# Altium PCB PCB1.PcbDoc
Units mm, origin at the board's own origin, x right, y up, seen from the top; angles counter-clockwise.
Board outline 72 x 40 mm, 2 copper layers (Top Layer, Bottom Layer); 35 components, 27 nets, 150 pads, 55 vias.
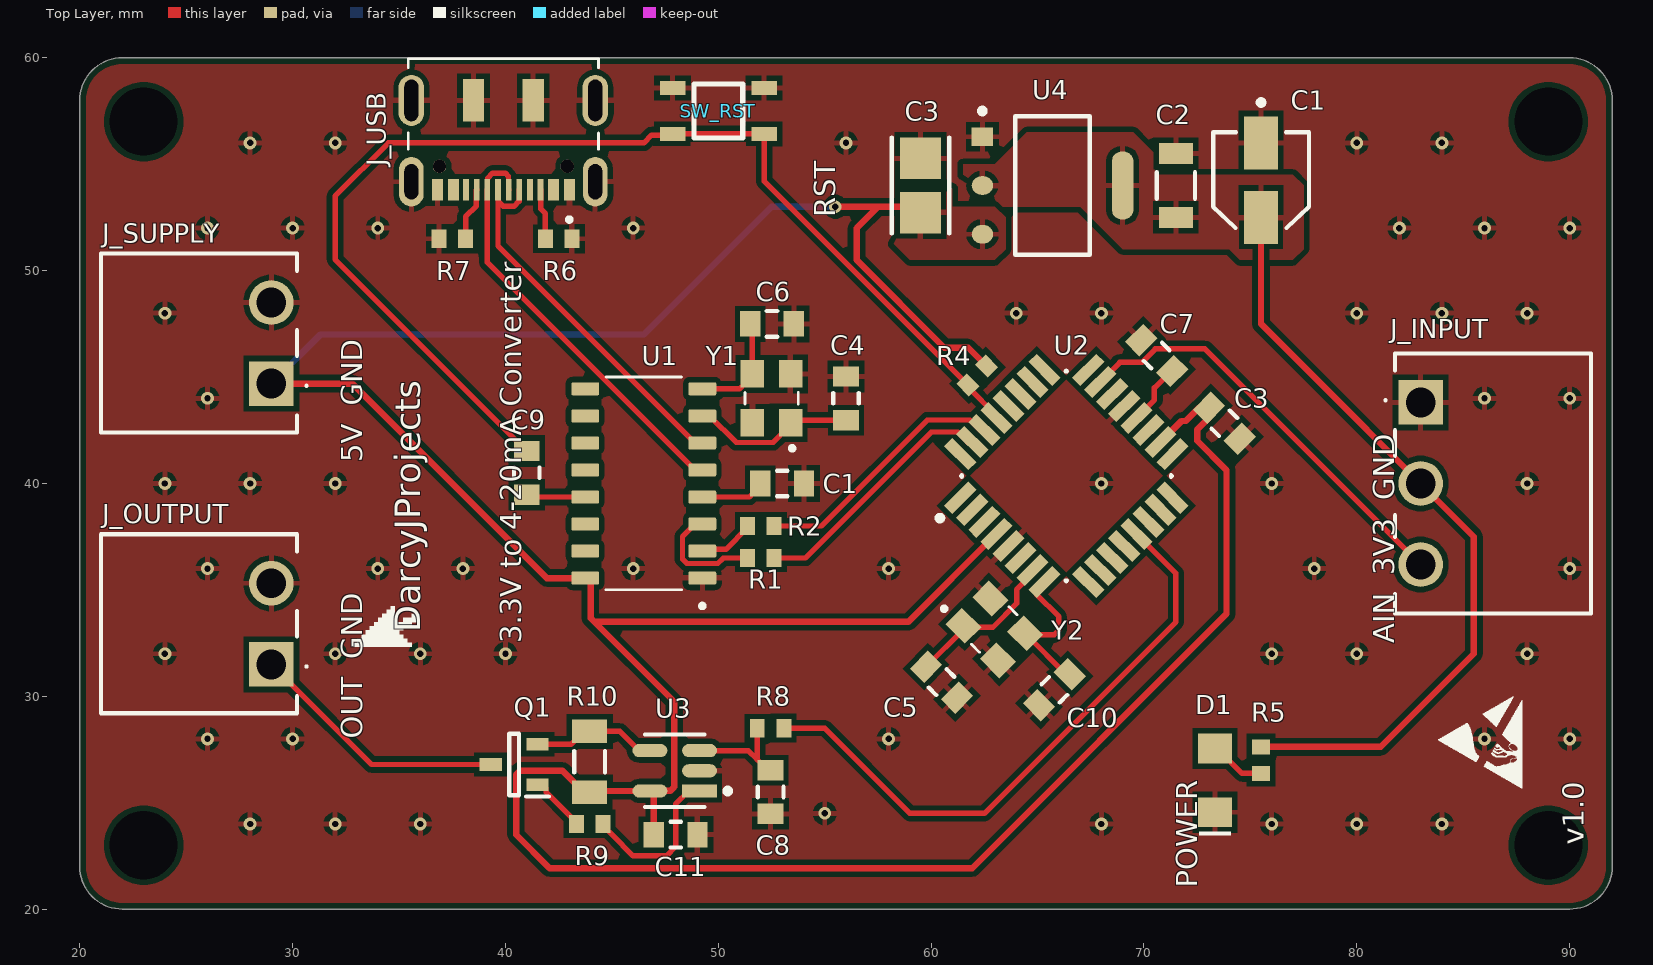
[diagram p0: Top Layer view]
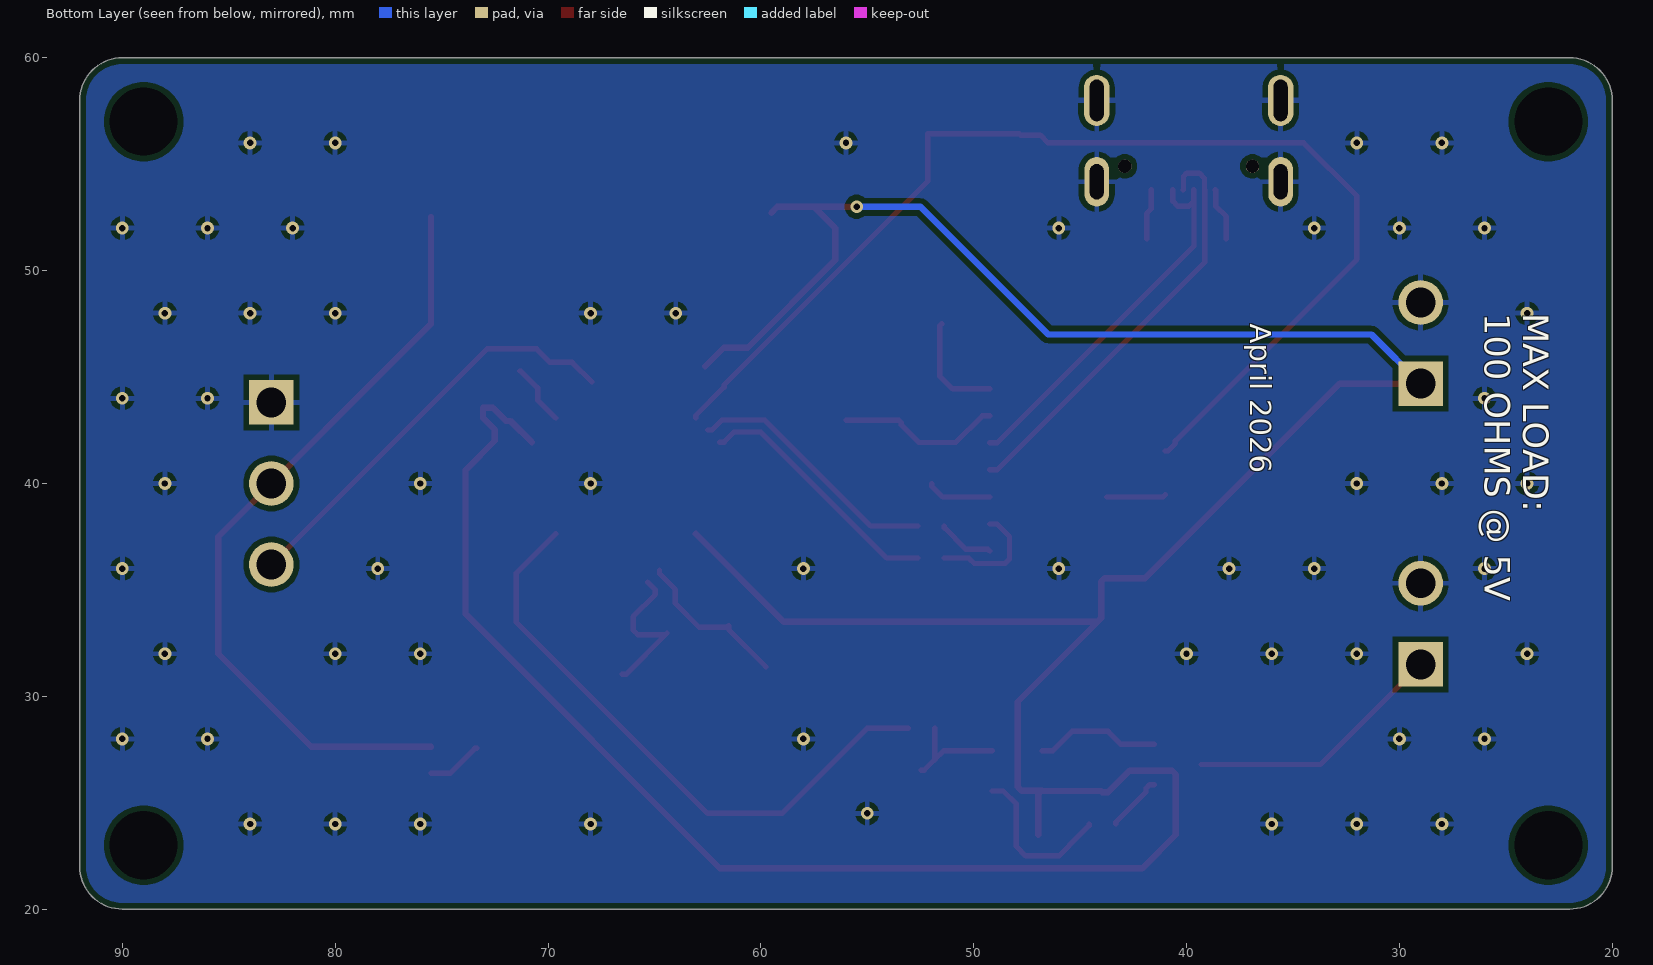
[diagram p1: Bottom Layer view, seen from below]
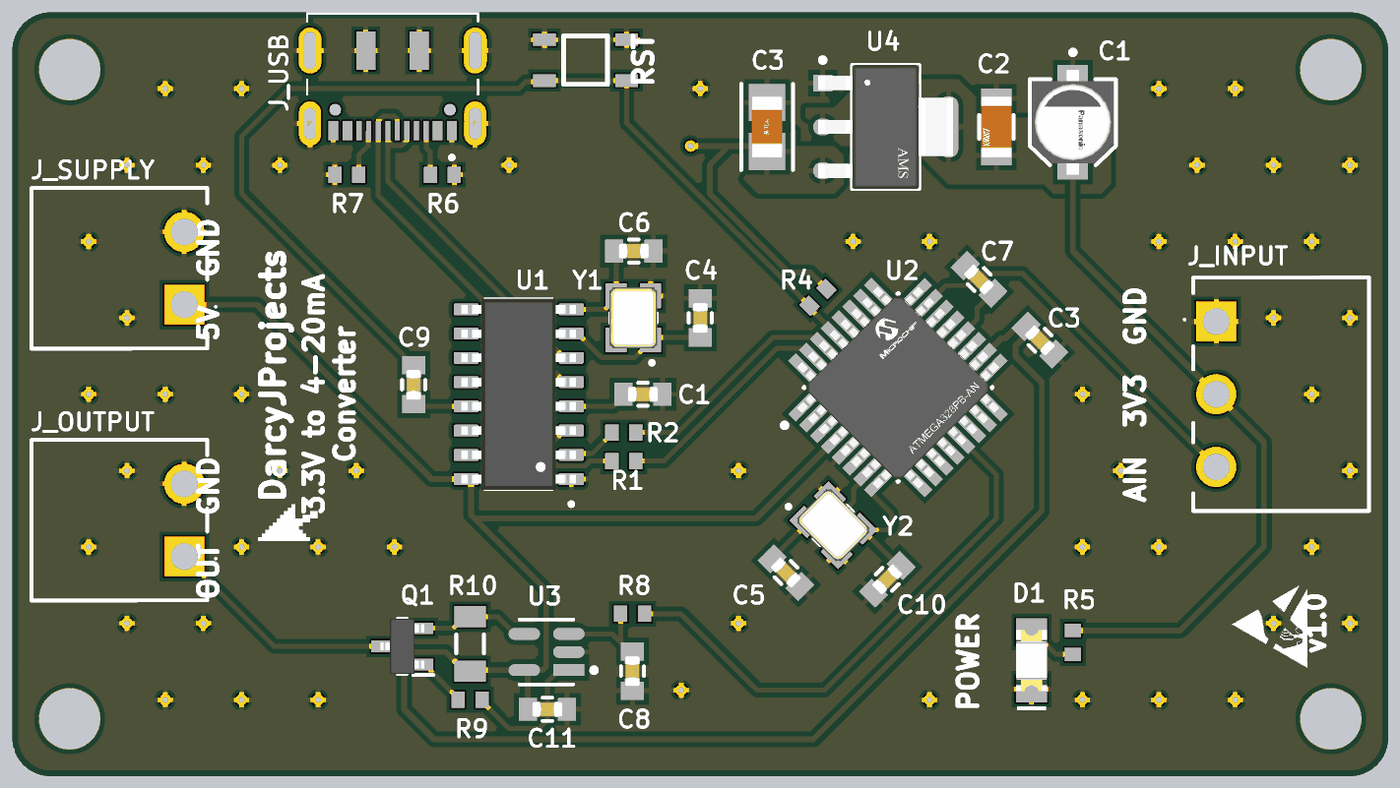
[diagram p2: 3D render of the assembled board from above, using the file's embedded part models]

## Layer stack, top to bottom
Top Solder: solder mask 0.0102, Solder Resist, Dk 3.5
Top Layer: signal copper 0.0356
Dielectric 1: dielectric 0.32, FR-4, Dk 4.8
Bottom Layer: signal copper 0.0356
Bottom Solder: solder mask 0.0102, Solder Resist, Dk 3.5

## Board outline
20,22 20,58 cw(c22,58) 22,60 90,60 cw(c90,58) 92,58 92,22 cw(c90,22) 90,20 22,20 cw(c22,22)

## Design rules (kind name [scope] priority, off if disabled: settings)
BoardOutlineClearance [All] p1: gap=0.3 ignorepadtopadclearanceinfootprint=FALSE
Clearance [All] p1: gap=0.254 ignorepadtopadclearanceinfootprint=FALSE except(0.15: Arc-Arc Arc-Track Arc-SMDPad Track-Track Track-SMDPad SMDPad-SMDPad)
PolygonConnect [All] p1: connectstyle=Relief reliefconductorwidth=0.254 reliefentries=4 polygonreliefangle="90 Angle" airgapwidth=0.254
RoutingVias [All] p1: holewidth=0.3 width=0.6 viastyle="Through Hole" minholewidth=0.3 minwidth=0.6 maxholewidth=0.4 maxwidth=0.7
SolderMaskExpansion [All] p1: expansion=0.102 istentingtop=FALSE
SupplyNets "Schematic Supply Nets_2" [InNet('3V3')] p1: voltage=0.000
SupplyNets "Schematic Supply Nets_1" [InNet('GND')] p2: voltage=0.000
SupplyNets "Schematic Supply Nets" [InNet('+5')] p3: voltage=0.000
Width Width_Power [InNetClass('POWER')] p1: maxlimit=0.3 minlimit=0.3 preferedwidth=0.3 minimp=50.000000 maximp=50.000000 favimp=50.000000
Width [All] p2: maxlimit=0.254 minlimit=0.254 preferedwidth=0.254
30 further rules are at their usual default settings.

## Classes and differential pairs
net class POWER: 3V3 +5 GND
component class Main: C1 C2 C3 C4 C5 C6 C7 C8 C9 C10 C11 D1 J_INPUT J_OUTPUT J_SUPPLY J_USB Q1 R1 R2 R4 R5 R6 R7 R8 R9 R10 SW_RST U1 U2 U3 U4 Y1 Y2

## Components (designator, comment, footprint, x,y, rotation, side; value= is the part's Value field where it differs from the comment)
C1 "100nF" FP-CGA3E-0_3-0_1-IPC_A 53,40 r180 top
C1 "10uF" FP-FKB-MFG 75.5,54.25 r270 top
C2 "100nF" FP-1206-L_3_2_0_2-W_1_6_0-MFG 71.5,54 r270 top
C3 "100nF" FP-CGA3E-0_3-0_1-IPC_A 73.778,42.828 r315 top
C3 "10uF" FP-C3216-160-0_2-IPC_A 59.5,54 r90 top
C4 "22pF" FP-CGA3E-0_3-0_1-IPC_A 56,44 r90 top
C5 "22pF" FP-CGA3E-0_3-0_1-IPC_A 60.487,30.664 r315 top
C6 "22pF" FP-CGA3E-0_3-0_1-IPC_A 52.525,47.5 r0 top
C7 "100nF" FP-CGA3E-0_3-0_1-IPC_A 70.596,46.01 r135 top
C8 "1uF" FP-CGA3E-0_3-0_1-IPC_A 52.455,25.5 r270 top
C9 "100nF" FP-CGA3E-0_3-0_1-IPC_A 41,40.5 r270 top
C10 "22pF" FP-CGA3E-0_3-0_1-IPC_A 65.79,30.31 r225 top
C11 "100nF" FP-CGA3E-0_3-0_1-IPC_A 48,23.5 r180 top
D1 "Red 1206" WL-SMCW_1206_150120xx75000 73.337,26.054 r90 top
J_INPUT "3Pin" 15EDGRC-3.81-03P 83,43.81 r270 top
J_OUTPUT "15EDGRC-3.81-02P" 15EDGRC-3.81-02P 29,31.5 r90 top
J_SUPPLY "15EDGRC-3.81-02P" 15EDGRC-3.81-02P 29,44.69 r90 top
J_USB "USBC" JAE_DX07S016JA1R1500 39.9,54.9 r180 top
Q1 "MMBT3906,215" SOT95P230X110-3N 40.407,26.796 r180 top
R1 "1K" RESC1608X55X30LL15T15 52,36.5 r180 top
R2 "1K" RESC1608X55X30LL15T15 52,38 r180 top
R4 "10K" RESC1608X55X30LL15T15 62.166,45.071 r45 top
R5 "5.1K" RESC1608X55X30LL15T15 75.5,27 r270 top
R6 "5.1K" RESC1608X55X30LL15T15 42.5,51.5 r180 top
R7 "5.1K" RESC1608X55X30LL15T15 37.5,51.5 r0 top
R8 "10K" RESC1608X55X30LL15T15 52.455,28.5 r0 top
R9 "1K" RESC1608X55X30LL15T15 43.955,24 r0 top
R10 "100R" RESC3216X70X50NL05T20 43.955,26.925 r90 top
SW_RST "3x4x2.5_TACTILE_BUTTON" 3x4x2.5_TACTILE_BUTTON 50,57.5 r180 top
U1 "CH340G" SOIC127P600X180-16N 46.5,40 r180 top
U2 "ATMEGA328PB-AN" FP-C04-074-MFG 66.354,40.354 r45 top
U3 "MCP6001T-I/OT" FP-C04-091-OT-IPC_A 47.955,26.5 r180 top
U4 "AMS1117-3.3" FP-AMS1117-IPC_C 65.705,54 r0 top
Y1 "3225 12MHz" XTAL_ECS-250-18-33B-JGN-TR 52.5,44 r90 top
Y2 "3225 16MHz" XTAL_ECS-250-18-33B-JGN-TR 62.962,33.139 r315 top

## Footprints (in the part's own frame and the unit in brackets; to place one, negate y for a bottom-side part, rotate by r counter-clockwise, add the part's x,y. Pads: shape width x height; smd on the part's side, far side on the other; paste and mask are expansions set on the pad)
3x4x2.5_TACTILE_BUTTON [mm]
  rect 1.2x0.65 smd: 1(-2.15,1.075) 2(2.15,1.075) 3(-2.15,-1.075) 4(2.15,-1.075)
  silkscreen extent -1.14,-1.27 1.14,1.27
15EDGRC-3.81-02P [mm]
  rect 2.1x2.1 hole 1.4: 1(0,0)
  round 2.1 hole 1.4: 2(3.81,0)
  silkscreen extent -2.3,-1.7 6.11,8
15EDGRC-3.81-03P [mm]
  rect 2.1x2.1 hole 1.4: 1(0,0)
  round 2.1 hole 1.4: 2(3.81,0) 3(7.62,0)
  silkscreen extent -2.3,-1.7 9.92,8
FP-1206-L_3_2_0_2-W_1_6_0-MFG [mm]
  rect 1x1.6 smd paste+0 mask+0: 1(-1.5,0) 2(1.5,0)
  silkscreen extent -0.63,-0.9 0.63,0.9, body extent -2.1,-1 2.1,1, height 0.25
FP-AMS1117-IPC_C [mm]
  rect 1.004x0.872 smd paste+0 mask+0: 1(-3.295,2.29)
  rrect100% 1.004x0.872 smd paste+0 mask+0: 2(-3.295,0) 3(-3.295,-2.29)
  rrect87% 1.004x3.182 smd paste+0 mask+0: 4(3.295,0)
  silkscreen extent -3.42,-3.25 1.75,3.62, body extent -3.9,-3.35 3.9,3.35, height 0.25
FP-C04-074-MFG [mm]
  rect 1.6x0.55 smd paste+0 mask+0: 1(-4.25,2.8) 2(-4.25,2) 3(-4.25,1.2) 4(-4.25,0.4) 5(-4.25,-0.4) 6(-4.25,-1.2) 7(-4.25,-2) 8(-4.25,-2.8) 17(4.25,-2.8) 18(4.25,-2) 19(4.25,-1.2) 20(4.25,-0.4) 21(4.25,0.4) 22(4.25,1.2) 23(4.25,2) 24(4.25,2.8)
  rect 0.55x1.6 smd paste+0 mask+0: 9(-2.8,-4.25) 10(-2,-4.25) 11(-1.2,-4.25) 12(-0.4,-4.25) 13(0.4,-4.25) 14(1.2,-4.25) 15(2,-4.25) 16(2.8,-4.25) 25(2.8,4.25) 26(2,4.25) 27(1.2,4.25) 28(0.4,4.25) 29(-0.4,4.25) 30(-1.2,4.25) 31(-2,4.25) 32(-2.8,4.25)
  silkscreen extent -5.72,-3.5 3.5,3.5, body extent -5.15,-5.15 5.15,5.15, height 0.25
FP-C04-091-OT-IPC_A [mil]
  rect 64.5x24.33 smd paste+0 mask+0: 1(-45.91,37.4)
  rrect100% 64.5x24.33 smd paste+0 mask+0: 2(-45.91,0) 3(-45.91,-37.4) 4(45.91,-37.4) 5(45.91,37.4)
  silkscreen extent -103,-67 55,67
FP-C3216-160-0_2-IPC_A [mm]
  rect 1.954x1.906 smd paste+0 mask+0: 1(-1.276,0) 2(1.276,0)
  silkscreen extent -2.25,-1.35 2.25,1.35, body extent -2.75,-1.45 2.75,1.45, height 0.25
FP-CGA3E-0_3-0_1-IPC_A [mm]
  rect 0.956x1.206 smd paste+0 mask+0: 1(-1.025,0) 2(1.025,0)
  silkscreen extent -0.25,-0.6 0.25,0.6, body extent -2,-1.1 2,1.1, height 0.25
FP-FKB-MFG [mm]
  rect 2.5x1.6 smd paste+0 mask+0: 1(-1.75,0) 2(1.75,0)
  silkscreen extent -3.77,-2.25 2.25,2.25, body extent -3.25,-2.5 3.25,2.5, height 0.25
JAE_DX07S016JA1R1500 [mm]
  rect 0.52x1 smd: 1(-3.1,1.1) 2(-2.35,1.1) 11(2.35,1.1) 12(3.1,1.1)
  rect 0.27x1 smd: 3(-1.75,1.1) 4(-1.25,1.1) 5(-0.75,1.1) 6(-0.25,1.1) 7(0.25,1.1) 8(0.75,1.1) 9(1.25,1.1) 10(1.75,1.1)
  rect 1x2 smd: S1(-1.4,-3.1) S2(1.4,-3.1)
  oval 1.158x2.316 hole 0.65 slot 1.65 at 90 deg: S3(-4.32,0.725) S4(4.32,0.725)
  oval 1.2x2.4 hole 0.65 slot 1.95 at 90 deg: S5(-4.32,-3.1) S6(4.32,-3.1)
  round 0.63 hole 0.63 unplated: ""(-3,0) ""(3,0)
  round 0.6 hole 0.6 unplated: ""(3,0)
  silkscreen extent -4.47,-5.05 4.47,2.6
RESC1608X55X30LL15T15 [mm] "Chip Resistor, 2-Leads, Body 1.60x0.80mm, IPC High Density"
  rect 0.7x0.85 smd: 1(-0.625,0) 2(0.625,0)
  body extent -0.87,-0.48 0.87,0.48, height 0.55
RESC3216X70X50NL05T20 [mm] "Chip Resistor, 2-Leads, Body 3.20x1.60mm, IPC Medium Density"
  rect 1.1x1.65 smd: 1(-1.425,0) 2(1.425,0)
  silkscreen extent -0.5,-0.72 0.5,0.72, body extent -1.63,-0.82 1.62,0.82, height 0.7
SOIC127P600X180-16N [mm]
  rrect25% 1.31x0.62 smd: 1(-2.75,4.445) 2(-2.75,3.175) 3(-2.75,1.905) 4(-2.75,0.635) 5(-2.75,-0.635) 6(-2.75,-1.905) 7(-2.75,-3.175) 8(-2.75,-4.445) 9(2.75,-4.445) 10(2.75,-3.175) 11(2.75,-1.905) 12(2.75,-0.635) 13(2.75,0.635) 14(2.75,1.905) 15(2.75,3.175) 16(2.75,4.445)
  silkscreen extent -2.85,-5 1.78,5.85, body extent -3,-5 3,5, height 1.8
SOT95P230X110-3N [mm]
  rect 1.05x0.6 smd: 1(-1.1,0.95) 2(-1.1,-0.95) 3(1.1,0)
  silkscreen extent -1.63,-1.45 0.23,1.5, body extent -1.15,-1.45 1.15,1.45, height 1.1
WL-SMCW_1206_150120xx75000 [mm] "SMD Mono-color Chip LED, body 3.2x1.6mm"
  rect 1.4x1.6 smd: 1(-1.5,0) 2(1.5,0)
  silkscreen extent -2.6,-0.75 -2.4,0.75, body extent -1.6,-0.8 1.6,0.8, height 0.68
XTAL_ECS-250-18-33B-JGN-TR [mm]
  rect 1.3x1.1 smd: 1(-1.15,-0.9) 2(1.15,-0.9) 3(1.15,0.9) 4(-1.15,0.9)
  silkscreen extent -2.45,-1.25 0.27,1.25, body extent -1.6,-1.25 1.6,1.25, height 0.8

## Part data
C1 C3 C7 C9 C11: library part CMP-2000-07546-2, "Cap Ceramic 100nF 50V X7R 10% Pad SMD 0603 +125°C Automotive T/R", Case Code (Imperial)=0603, Case Code (Metric)=1608, Dielectric=X7R, Max Operating Temperature=125°C, Min Operating Temperature=-55°C, Package Quantity=1, Ratings=AEC-Q200, Tolerance=10%, Voltage=50V, Capacitance=100nF, Case/Package=0603, Composition=Ceramic, Depth=0.8mm, Height=0.8mm, Lead Free="Lead Free", Length=1.6mm, Mount="Surface Mount", Packaging="Tape and Reel", Radiation Hardening=No, REACH SVHC="No SVHC", Termination=SMD/SMT, Thickness=0.035inch, Voltage Rating=50V, Voltage Rating (DC)=50V, Weight=7.1E-05oz, Width=0.8mm
C1: library part CMP-2000-06211-2, "CAP ALUM 10UF 20% 35V SMD", Case/Package=Radial, ESR (Equivalent Series Resistance)=1.35R, Leakage Current=3uA, Max Operating Temperature=105°C, Min Operating Temperature=-55°C, Package Quantity=1, Ripple Current=90mA, Tolerance=20%, Voltage=35V, Capacitance=10uF, Construction=Cylindrical, Contact Plating=Tin, Diameter=4mm, Height=5.8mm, Height - Seated (Max)=0.24inch, Impedance=1.35R, Lead Free="Lead Free", Length=5.8mm, Life (Hours)=2000Hour, Material=Aluminium, Mount="Surface Mount", Number of Pins=2, Packaging="Tape and Reel", Polarity=Polar, Radiation Hardening=No, REACH SVHC="No SVHC", Ripple Current (AC)=90mA, RoHS Compliant=Yes, Series=FK, Termination=SMD/SMT, Voltage Rating=35V, Voltage Rating (DC)=35V, Width=5.5mm
C2: library part CMP-2000-05018-2, "General Purpose Ceramic Capacitor, 1206, 100nF, 10%, X7R, 15%, 50V", Case Code (Imperial)=1206, Case Code (Metric)=3216, Dielectric=X7R, Dielectric Material=Ceramic, Insulation Resistance=100GR, Max Operating Temperature=125°C, Min Operating Temperature=-55°C, Package Quantity=1, Tolerance=10%, Voltage=50V, Capacitance=100nF, Case/Package=1206, Construction=Flat, Contact Plating=Tin, Depth=1.6mm, Dissipation Factor=2.5%, Height=0.94mm, Lead Free="Lead Free", Length=3.2mm, Mount="Surface Mount", Number of Pins=2, Packaging="Tape and Reel", Radiation Hardening=No, REACH SVHC="No SVHC", RoHS Compliant=Yes, Series=-, Termination=SMD/SMT, Thickness=0.037inch, Voltage Rating=50V, Voltage Rating (DC)=50V, Width=1.6mm
C3: library part CMP-2000-06045-2, "Multilayer Ceramic Capacitors 10uF ±10% 50V X5R SMD 1206", Case Code (Imperial)=1206, Case Code (Metric)=3216, Dielectric=X5R, Dielectric Material=Ceramic, Max Operating Temperature=85°C, Min Operating Temperature=-55°C, Package Quantity=1, Tolerance=10%, Voltage=50V, Capacitance=10uF, Case/Package=1206, Construction=Flat, Depth=1.6mm, Height=1.6mm, Lead Free="Lead Free", Length=3.2mm, Mount="Surface Mount", Packaging="Tape and Reel", Radiation Hardening=No, REACH SVHC="No SVHC", Resistor Type=Ceramic, RoHS Compliant=Yes, Series=C, Termination=SMD/SMT, Thickness=0.071inch, Voltage Rating=50V, Voltage Rating (DC)=50V, Weight=0.000571oz, Width=0.063inch
C4 C5 C6 C8 C10: library part CMP-2000-07546-2, "Cap Ceramic 100nF 50V X7R 10% Pad SMD 0603 +125°C Automotive T/R", Capacitance=100nF, Case Code (Imperial)=0603, Case Code (Metric)=1608, Dielectric=X7R, Max Operating Temperature=125°C, Min Operating Temperature=-55°C, Package Quantity=1, Ratings=AEC-Q200, Tolerance=10%, Voltage=50V, Case/Package=0603, Composition=Ceramic, Depth=0.8mm, Height=0.8mm, Lead Free="Lead Free", Length=1.6mm, Mount="Surface Mount", Packaging="Tape and Reel", Radiation Hardening=No, REACH SVHC="No SVHC", Termination=SMD/SMT, Thickness=0.035inch, Voltage Rating=50V, Voltage Rating (DC)=50V, Weight=7.1E-05oz, Width=0.8mm
D1: library part CMP-1426-00017-3, "Led, Red, 630 Nm, 1.9 V, 30 Ma, 60 Mcd Rohs Compliant: Yes", Case Code (Imperial)=1206, Case Code (Metric)=3216, Color=Red, Forward Current=100mA, Forward Voltage=1.9V, Max Operating Temperature=85°C, Max Reverse Voltage (DC)=5V, Min Operating Temperature=-40°C, Test Current=20mA, Case/Package=1206, Dominant Wavelength=630nm, Height=680µm, Length=3.2mm, Lens Style="Clear, Rectangular", Luminous Intensity=60mcd, Mount="Surface Mount", Packaging="Tape and Reel", Peak Wavelength=645nm, REACH SVHC=Unknown, RoHS=Compliant, Viewing Angle=140°, Wavelength=630nm, Width=1.6mm
J_INPUT: library part 15EDGRC-3.81-03P, Manufacturer_Name=Degson, Manufacturer_Part_Number=15EDGRC-3.81-02P-14-00A(H), Datasheet Link=https://www.tme.com/uz/ru/details/15edgrc3.81-02p/klemmnye-kolodki-razemnogo-tipa/degson-electronics/15edgrc-3-81-02p-14-00a-h/, Geometry.Height=7.2mm
J_OUTPUT J_SUPPLY: Manufacturer_Name=Degson, Manufacturer_Part_Number=15EDGRC-3.81-02P-14-00A(H), Datasheet Link=https://www.tme.com/uz/ru/details/15edgrc3.81-02p/klemmnye-kolodki-razemnogo-tipa/degson-electronics/15edgrc-3-81-02p-14-00a-h/, Geometry.Height=7.2mm
J_USB: library part DX07S016JA1R1500, "USB-C (USB TYPE-C) USB 2.0 Receptacle Connector 24 (16+8 Dummy) Position Surface Mount, Right Angle; Through Hole", Package=None, Availability=Unavailable, MP=DX07S016JA1R1500, Price=None
Q1: "Bipolar (BJT) Transistor PNP 40 V 200 mA 250MHz 250 mW Surface Mount TO-236AB", Package="SOT23-3 Nexperia USA Inc.", Check_prices=https://www.snapeda.com/parts/MMBT3906,215/Nexperia/view-part/?ref=eda, MF="Nexperia USA", MP=MMBT3906,215, SnapEDA_Link=https://www.snapeda.com/parts/MMBT3906,215/Nexperia/view-part/?ref=snap
R1 R2 R4 R5 R6 R7 R8 R9: library part CMP-2000-00803-1, Manufacturer=Panasonic, Part Number=ERJ-3GEYJ512V
R10: library part CMP-2003-00592-1, Manufacturer=Panasonic, Part Number=ERJ-8GEYJ241V
U1: "USB Interface Integrated Circuit", Package=None, Availability="Not in stock", Check_prices=https://www.snapeda.com/parts/Ch340G/WCH/view-part/?ref=eda, MF=WCH, MP=Ch340G, Price=None, SnapEDA_Link=https://www.snapeda.com/parts/Ch340G/WCH/view-part/?ref=snap
U2: library part CMP-06276-000029-1, "IC MCU 8BIT 32KB FLASH 32TQFP", Frequency=20MHz, Manufacturer=Microchip, Max Supply Voltage=5.5V, Min Supply Voltage=1.8V, Nominal Supply Current=0.06-5.2mA, Package=C04-074, Temperature="-40°C to +105°C", Temperature Range High=+105°C, Temperature Range Low=-40°C, Automotive=No, Category=IC, ComponentLink2Description=Datasheet, ComponentLink2URL=http://www.microchip.com/mymicrochip/filehandler.aspx?ddocname=en589665, Core Architecture=AVR, Data Bus Width=8bits, Device Class L1="Integrated Circuits (ICs)", Device Class L2="Embedded Processors and Controllers", Device Class L3=Microcontrollers, Digikey Description="IC MCU 8BIT 32KB FLASH 32TQFP", Footprint Url=https://ww1.microchip.com/downloads/en/DeviceDoc/32L_TQFP_7x7_PT_C04-0074B.pdf, Height=1.2mm, Interface=I2C,SPI,USART,2-Wire, Ipc Land Pattern Name=QFP80P900X900X120-32, Lead Free=Yes, Manufacturer Part Number=ATMEGA328PB-AN, Memory Size=32KBytes, Memory Type=FLASH, Mouser Description="AVR 32KBytes Flash, 1KBytes EEPROM, 2KBytes RAM, w - 20MHZ, TQFP, Extended TEMP, GREEN 5 V", Number Of A/D Converters=1, Number Of Adc Channels=8, Number Of Cores=1, Number Of I2C Channels=2, Number Of I/Os=27, Number Of Pwm Channels=10, Number Of Spi Channels=2, Number Of Timers/Counters=5, Number Of Uart Channels=2, Octopart=https://octopart.com/atmega328pb-an-microchip-77760226, Ram Size=2KBytes, RoHS=TRUE, Standoff Height=0.05mm
U3: library part CMP-0187-00462-3, "IC OPAMP GP 1 CIRCUIT SOT23-5", Case/Package=SOT-23, Input Bias Current=1pA, Input Offset Voltage (Vos)=4.5mV, Max Operating Temperature=85°C, Max Supply Voltage=6V, Min Operating Temperature=-40°C, Min Supply Voltage=1.8V, Nominal Supply Current=100uA, Operating Supply Voltage=5.5V, Output Current=23mA, Package Quantity=1, Power Supply Rejection Ratio (PSRR)=86dB, Voltage Gain=112dB, Bandwidth=1MHz, Common Mode Rejection Ratio=60dB, Contact Plating=Tin, Gain Bandwidth Product=1MHz, Height=1.3mm, Lead Free="Lead Free", Length=3.1mm, Mount="Surface Mount", Number of Amplifiers=1, Number Of Channels=1, Number of Circuits=1, Number of Elements=1, Number of Pins=5, Operating Supply Current=100uA, Output Current per Channel=23mA, Packaging="Tape and Reel", Radiation Hardening=No, REACH SVHC="No SVHC", Slew Rate=0.6V/µs, Unity Gain Bandwidth Product=1MHz, Voltage=6V, Width=1.8mm
U4: library part CMP-209535-000001-1, "LDO Voltage Regulators 1A, 3.3V", Dropout Voltage=1.1V, Manufacturer="Advanced Monolithic Systems", Max Junction Temp=+125°C, Max Power Dissipation=1.2W, Max Supply Voltage=15V, Nominal Supply Current=5mA, Output Current=1A, Output Voltage=3.3V, Package=AMS1117, Temperature="-40°C to +125°C", Temperature Range Low=-40°C, Automotive=No, Category=IC, ComponentLink2Description=Datasheet, ComponentLink2URL=http://www.advanced-monolithic.com/pdf/ds1117.pdf, Device Class L1="Integrated Circuits (ICs)", Device Class L2="Power Management ICs", Device Class L3="Voltage Regulators - Linear", Height=1.8mm, Ipc Land Pattern Name=SOT229P700X180-4, Lead Free=Yes, Manufacturer Part Number=AMS1117-3.3, Number of Outputs=1, Octopart=https://octopart.com/ams1117-3.3-advanced+monolithic+systems-25899300, Output Type=Fixed, RoHS=TRUE, Standoff Height=0.64mm, Temperature Range High=+125°C
Y1 Y2: library part ECS-250-18-33B-JGN-TR, Package=None, Availability=Unavailable, MP=ECS-250-18-33B-JGN-TR, Price=None

## Free pads (board coordinates)
  round 0 hole 3.2: 49(23,23) 49(23,57) 49(89,23) 49(89,57)

## Via types
v1: diameter 0.6, hole 0.3, Top Layer to Bottom Layer, 55 vias

## Nets (pads, with @x,y where several pads share a name; then routed paths per layer and width w, separated by ;. In a path a pad name is that pad's centre, name@x,y a point inside that pad or via, vN(x,y) a via of type N, cw(c..) or ccw(c..) an arc to the next point about the centre after c; other vN are vias at no path point)
3V3: C1.2@75.5,52.5 C2.2 J_INPUT.2 R5.1 U4.2 U4.4 | length 36.5
  Top Layer w0.3: R5.1 81.125,27.625 85.5,32 85.5,37.5 75.5,47.5 C1.2@75.5,52.5
+5: C3.1 C11.2 J_SUPPLY.1 R4.2 R10.1 U1.16 U2.4 U2.18 U3.5 U4.3 | length 161.3
  Top Layer w0.3: J_SUPPLY.1 32.81,44.69 41.945,35.555 U1.16 43.84,35.555 44,35.395 44,33.676 44.176,33.5 ; C11.2 46.975,25.403 46.828,25.55 U3.5 ; v1(55.5,53) 57.5,53 ; C3.1@59.5,52.724 59.224,53 57.5,53 ; R4.2 61.744,46.377 60.623,46.377 56.5,50.5 56.5,52 57.5,53 ; U2.4 58.934,33.5 44.176,33.5 ; U2.18 71.763,42.934 71.971,42.934 72.589,43.553 73.053,43.553 73.053,43.089 72.5,42.536 72.5,42 73.876,40.624 73.876,33.876 61.927,21.927 42.073,21.927 40.5,23.5 40.5,26.324 40.676,26.5 42.68,26.5 43.68,25.5 R10.1 44.005,25.55 U3.5 ; 44.176,33.5 47.933,29.743 47.933,25.742 47.757,25.566 46.805,25.566 U3.5
  Bottom Layer w0.3: J_SUPPLY.1 31.31,47 46.5,47 52.5,53 v1(55.5,53)
ARD_RX: R2.1 U2.30 | length 12.1
  Top Layer w0.254: R2.1 54.843,38 59.824,42.982 61.819,42.982 62.291,42.51 U2.30
ARD_TX: R1.1 U2.31 | length 12
  Top Layer w0.254: R1.1 54.093,36.5 60.009,42.416 61.253,42.416 61.725,41.945 U2.31
CURRENT_OUT: J_OUTPUT.1 Q1.3 | length 12.3
  Top Layer w0.254: J_OUTPUT.1 33.704,26.796 Q1.3
D+: J_USB.6 J_USB.8 U1.5 | length 19.9
  Top Layer w0.254: J_USB.6@40.154,53.804 40.142,53.816 40.142,54.428 39.993,54.577 39.4,54.577 39.158,54.335 39.158,53.808 J_USB.8 39.15,50.39 48.905,40.635 U1.5
D-: J_USB.5 J_USB.7 U1.6 | length 18.3
  Top Layer w0.254: J_USB.5 40.642,53.792 40.642,53.265 40.4,53.023 39.9,53.023 39.658,53.265 39.658,53.792 J_USB.7 39.65,51.16 48.905,41.905 U1.6
GND: C1.1 C2.1 C3.2 C4.2 C5.2 C6.2 C7.2 C8.2 C10.2 C11.1 D1.1 J_INPUT.1 J_OUTPUT.2 J_SUPPLY.2 J_USB.1 J_USB.12 J_USB.S1 J_USB.S2 J_USB.S3 J_USB.S4 J_USB.S5 J_USB.S6 R6.1 R7.1 SW_RST.3 SW_RST.4 U1.1 U2.5 U2.21 U3.2 U4.1 Y1.2 Y1.4 Y2.2 Y2.4
  other v1: 28,24 32,24 36,24 68,24 76,24 80,24 84,24 55,24.5 26,28 30,28 58,28 86,28 90,28 24,32 32,32 36,32 40,32 76,32 80,32 88,32 26,36 34,36 38,36 46,36 58,36 78,36 90,36 24,40 28,40 32,40 68,40 76,40 88,40 26,44 86,44 90,44 24,48 64,48 68,48 80,48 84,48 88,48 26,52 30,52 34,52 46,52 82,52 86,52 90,52 28,56 32,56 56,56 80,56 84,56
NetC1_2: C1.2@51.975,40 U1.4 | length 3.1
  Top Layer w0.254: U1.4 51.465,39.365 51.975,39.875 C1.2@51.975,40
NetC4_1: C4.1 U1.7 Y1.1 | length 7.8
  Top Layer w0.254: U1.7 49.595,43.175 50.847,41.923 52.573,41.923 53.4,42.75 Y1.1 53.525,42.975 C4.1
NetC5_1: C5.1 U2.7 Y2.1 | length 7.5
  Top Layer w0.254: C5.1 61.512,33.139 Y2.1 61.583,33.245 62.899,33.245 64.014,34.36 64.014,35.012 64.763,35.76 U2.7
NetC6_1: C6.1 U1.8 Y1.3 | length 5.1
  Top Layer w0.254: U1.8 50.995,44.445 51.6,45.05 Y1.3 51.6,47.4 C6.1
NetC7_1: C7.1 U2.20 | length 2.9
  Top Layer w0.254: U2.20 70.491,43.925 70.491,44.491 71.286,45.286 C7.1
NetC8_1: C8.1 R8.1 U3.3 | length 5.2
  Top Layer w0.254: U3.3 51.405,27.45 51.83,27.025 ; R8.1 51.83,27.025 ; C8.1 52.33,26.525 51.83,27.025
NetC9_2: C9.2 U1.13 | length 2.8
  Top Layer w0.254: C9.2 41.11,39.365 U1.13
NetC10_1: C10.1 U2.8 Y2.3 | length 7.4
  Top Layer w0.254: Y2.3 Y2.3@64.482,32.891 ; U2.8 64.957,34.997 64.957,34.788 66,33.745 66,33.111 65.78,32.891 Y2.3@64.482,32.891 ; C10.1 66.338,31.035 Y2.3@64.482,32.891
NetD1_2: D1.2 R5.2 | length 2.7
  Top Layer w0.254: D1.2 73.437,27.554 74.616,26.375 R5.2
NetJ_USB_3: J_USB.3 R6.2 | length 2.4
  Top Layer w0.254: J_USB.3 41.666,53.784 41.666,52.895 41.875,52.687 R6.2
NetJ_USB_9: J_USB.9 R7.2 | length 2.5
  Top Layer w0.254: R7.2 38.125,52.536 38.634,53.045 38.634,53.784 J_USB.9
NetQ1_1: Q1.1 R9.1 | length 2.7
  Top Layer w0.254: Q1.1 41.732,25.846 41.905,25.673 41.905,25.501 43.33,24.075 R9.1
NetQ1_2: Q1.2 R10.2 U3.4 | length 5.9
  Top Layer w0.254: Q1.2 43.076,27.746 43.68,28.35 R10.2 45.379,28.35 46.279,27.45 U3.4
NetR1_2: R1.2 U1.3 | length 5.5
  Top Layer w0.254: U1.3 48.905,38.095 48.318,37.508 48.318,36.446 48.526,36.238 49.974,36.238 50.236,36.5 R1.2
NetR2_2: R2.2 U1.2 | length 2.7
  Top Layer w0.254: U1.2 49.329,36.904 50.354,36.904 51.375,37.925 R2.2
NetR9_2: R9.2 U3.1 | length 7.6
  Top Layer w0.254: R9.2 44.58,23.925 45.5,23.005 45.5,23 46,22.5 47.558,22.5 48,22.942 48,24.939 48.611,25.55 U3.1
PWM: R8.2 U2.13 | length 28.7
  Top Layer w0.254: R8.2 55,28.5 59,24.5 62.5,24.5 71.5,33.5 71.5,35.773 U2.13
RESET: C9.1 R4.1 SW_RST.1 SW_RST.2 U2.29 | length 55
  Top Layer w0.254: C9.1 40.875,41.525 40.524,41.876 40.524,42.001 32,50.525 32,53.5 34.5,56 46.5,56 46.869,56.369 47.794,56.369 SW_RST.2 SW_RST.1 52.15,54.204 R4.1 61.724,44.523 63.066,43.182 U2.29
SENSOR: J_INPUT.3 U2.23 | length 19.9
  Top Layer w0.254: U2.23 68.865,45.694 69.898,45.694 70.531,46.327 72.863,46.327 J_INPUT.3
pads on no net: J_USB. J_USB.2 J_USB.4 J_USB.10 J_USB.11 U1.9 U1.10 U1.11 U1.12 U1.14 U1.15 U2.1 U2.2 U2.3 U2.6 U2.9 U2.10 U2.11 U2.12 U2.14 U2.15 U2.16 U2.17 U2.19 U2.22 U2.24 U2.25 U2.26 U2.27 U2.28 U2.32

## Polygon pours and split planes (outlines as drawn)
3V3 on Top Layer "NETF1_1" (solid, pour order 1): 77,54.5 77.5,54 77.5,51 77,50.5 74.5,50.5 74,51 69,51 67,53 61.5,53 61.5,55 63,55 64.5,56.5 69.5,56.5 70.5,55.5 70.5,54.5
GND on Top Layer "NETF1_1" (solid, pour order 3): 20,60 20,20 92,20 92,60
+5 on Top Layer "NETF1_1" (solid, pour order 0): 58,54.5 58,51.5 59,50.5 63,50.5 63.5,51 63.5,52.5 63,53 61,53 61,54 60.5,54.5
GND on Bottom Layer "NETF1_1" (solid, pour order 2): 20,60 20,20 92,20 92,60

## Silkscreen, mask and mechanical layers (free items; w line width, h text height)
Top Overlay:
  drawing of 4 lines, arcs and shapes, not listed
  text "RST" at 55.5,52.5 h1 r90
  text "5V  GND" at 33.26,41 h1 r90
  text "DarcyJProjects" at 36,33.005 h1.2 r90
  text "3.3V to 4-20mA Converter" at 40.743,32.5 h1 r90
  text "AIN  3V3  GND" at 81.76,32.5 h1 r90
  text "OUT  GND" at 33.26,28 h1 r90
  text "v1.0" at 90.672,23.024 h1 r90
  text "POWER" at 72.5,21 h1 r90
Bottom Overlay:
  text "MAX LOAD: / 100 OHMS @ 5V" at 25.98,47.995 h1.2 r90
  text "April 2026" at 37,47.5 h1 r90
Mechanical 1:
  the board outline again, w0.254

## Text inside footprints (layer, text, board x,y; h text height)
J_USB: Top 3D Body "PCB EDGE" at 34.4,59.65 h0.61 r180